# Altium PCB CSC002.pcbdoc (part 3 of 3)
Units mm, origin at the board's own origin, x right, y up, seen from the top; angles counter-clockwise.
Board outline 159.86 x 75.13 mm, 6 copper layers (Top Layer, Mid-Layer 1, Mid-Layer 2, GND, POWER, Bottom Layer), stack 2.494 mm thick; 78 components, 188 nets, 791 pads, 358 vias.
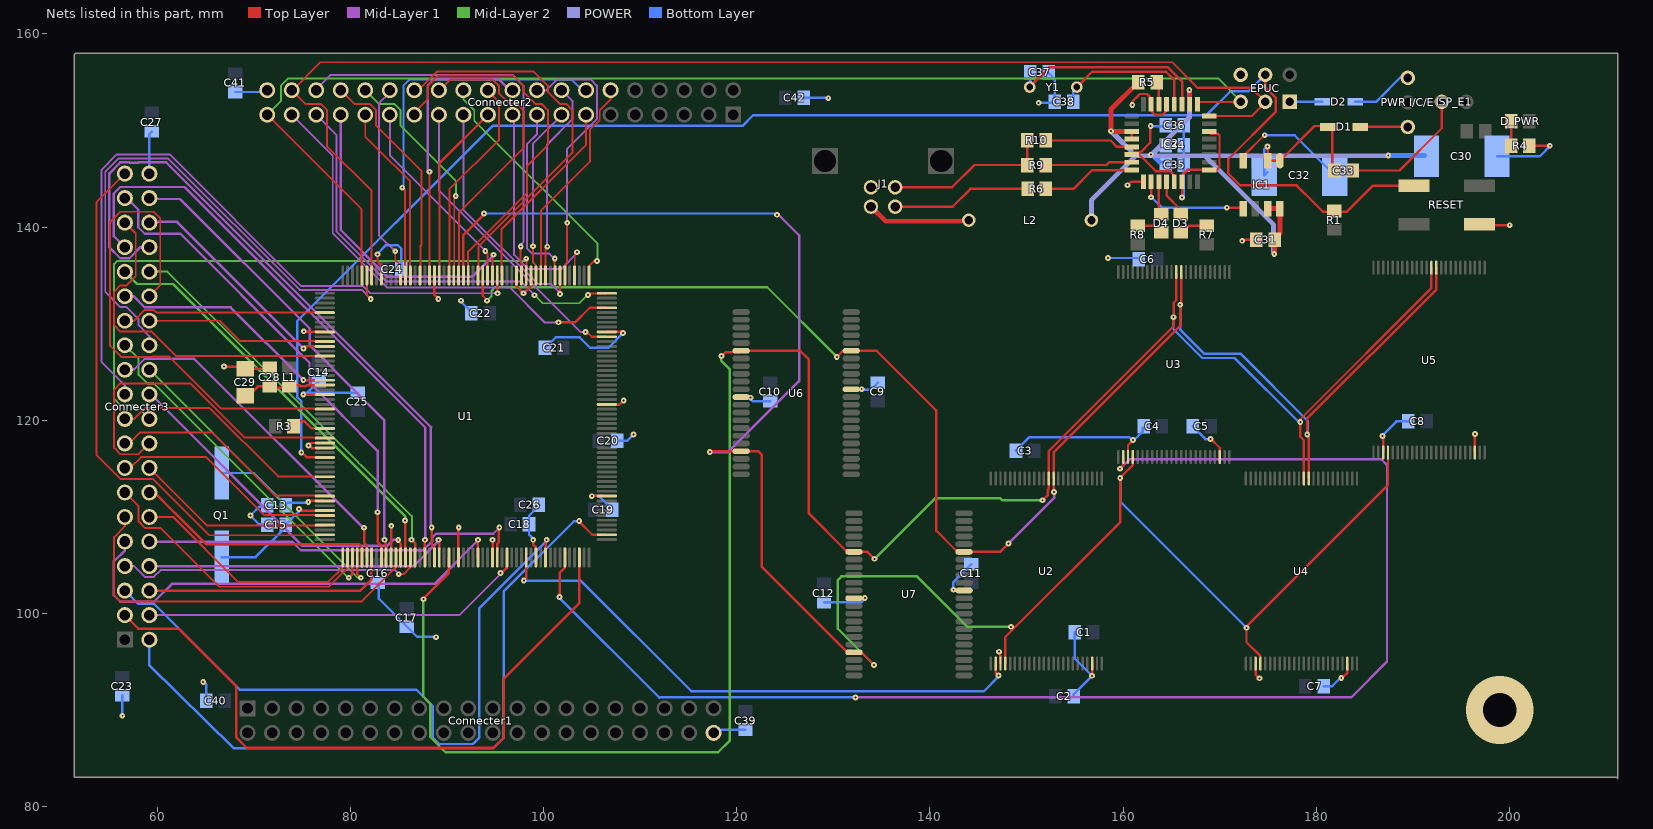
[diagram p7: the nets of this part, all layers, seen from the top]

## Via types
v1: diameter 0.6, hole 0.2, Top Layer to Bottom Layer, 354 vias
v2: diameter 0.6/0.6/0.6/0.6/0.6/0.6 (per signal layer), hole 0.2, Top Layer to Bottom Layer, 1 vias
v3: diameter 0.6, hole 0.2, Top Layer to Bottom Layer, tented bottom, 1 vias
v4: diameter 0.6, hole 0.2, Top Layer to Bottom Layer, tented top, 1 vias
v5: diameter 7, hole 3.5, Top Layer to Bottom Layer, 1 vias

## Nets (pads, with @x,y where several pads share a name; then routed paths per layer and width w, separated by ;. In a path a pad name is that pad's centre, name@x,y a point inside that pad or via, vN(x,y) a via of type N, cw(c..) or ccw(c..) an arc to the next point about the centre after c; other vN are vias at no path point) (continued)
EXT2-12: Connecter2.12 U1.167 | length 23
  Top Layer w0.2: U1.167@99.648,134.24 99.748,134.34 99.748,139.488 99.748,141.738 104.794,146.784 104.794,150.064 105.809,151.079 105.809,152.104 106.934,153.229 Connecter2.12@106.934,154.178
EXT2-13: Connecter2.13 U1.175 | length 20.2
  Top Layer w0.2: U1.175@95.748,135.06 95.66,135.148 95.66,139.803 104.394,148.537 Connecter2.13@104.394,151.638
EXT2-14: Connecter2.14 U1.195 | length 38.8
  Top Layer w0.2: v1@85.4,144.11 85.4,144.058 85.648,143.81 85.648,135.74 U1.195@85.748,135.64
  Bottom Layer w0.2: v1@85.489,144.15 85.489,154.644 86.148,155.303 102.867,155.303 103.992,154.178 Connecter2.14@104.394,154.178
  other v1: 85.36,144.08
EXT2-15: Connecter2.15 U1.168 | length 17.1
  Top Layer w0.2: v1(98.89,138.02) 98.89,136.34 99.148,136.082 U1.168@99.148,135.762
  Mid-Layer 1 w0.2: v1(98.89,138.02) 98.89,148.63 Connecter2.15@101.81,151.55
EXT2-16: Connecter2.16 U1.166 | length 20.8
  Top Layer w0.2: U1.166@100.198,134.996 100.198,137.738 v1@100.435,137.975
  Mid-Layer 1 w0.2: v1@100.35,138.01 100.35,148.543 102.979,151.172 102.979,152.113 102.97,152.122 102.97,153.08 Connecter2.16@101.87,154.18
  other v1: 100.38,137.97
EXT2-17: Connecter2.17 U1.164 | length 18.3
  Top Layer w0.2: v1@101.148,136.67 101.148,135.952 U1.164@101.19,135.91
  Mid-Layer 1 w0.2: Connecter2.17@99.314,151.638 99.314,149.62 98.3,148.606 98.3,138.279 98.29,138.269 98.29,137.771 98.811,137.25 100.6,137.25 101.11,136.74 v1@101.11,136.71
  other v1: 101.16,136.76
EXT2-18: Connecter2.18 U1.162 | length 30.6
  Top Layer w0.2: U1.162@102.16,135.9 102.248,135.988 102.248,136.148 102.42,136.32 102.42,140.41 v1(102.45,140.44)
  Mid-Layer 1 w0.2: Connecter2.18@99.3,154.12 100.205,154.12 101.388,155.303 104.86,155.303 105.519,154.644 105.519,151.172 102.44,148.093 102.44,138.72 102.45,138.72 v1(102.45,140.44)
EXT2-19: Connecter2.19 U1.160 | length 24.9
  Top Layer w0.2: U1.160@103.198,134.996 103.22,135.018 103.22,137.06 v1@103.5,137.34
  Mid-Layer 1 w0.2: Connecter2.19@96.774,151.638 96.95,151.462 96.95,137.131 98.421,135.66 101.81,135.66 v1@103.5,137.35
  other v1: 103.47,137.4
EXT2-20: Connecter2.20 U1.190 | length 28.7
  Top Layer w0.2: U1.190@88.17,135.61 88.17,136.61 88.19,136.63 v1(88.19,145.73)
  Mid-Layer 1 w0.254: v1@88.16,145.64 88,145.8 88,151.001 88.002,151.003 88.002,154.655 88.677,155.33 95.33,155.33 96.482,154.178 Connecter2.20@96.774,154.178
EXT2-21: Connecter2.21 U1.188 | length 18.7
  Top Layer w0.254: U1.188@89.221,135 89.221,146.625 Connecter2.21@94.234,151.638
EXT2-22: Connecter2.22 U1.186 | length 21.2
  Top Layer w0.2: U1.186@90.17,135.64 90.248,135.718 90.248,143.898 95.359,149.009 95.359,152.991 94.234,154.116 Connecter2.22@94.234,154.178
EXT2-23: Connecter2.23 U1.163 | length 25.3
  Top Layer w0.2: v1@101.698,133.112 U1.163@101.698,134.996
  Mid-Layer 1 w0.2: Connecter2.23@91.694,151.638 91.694,141.822 99.396,134.12 100.73,134.12 v1@101.72,133.13
  other v1: 101.7,133.07
EXT2-24: Connecter2.24 U1.157 | length 25.5
  Top Layer w0.2: U1.157@104.698,134.996 104.698,135.948 105.25,136.5 v1@105.53,136.5
  Mid-Layer 2 w0.2: Connecter2.24@91.694,154.178 91.694,153.229 92.819,152.104 92.819,151.031 105.59,138.26 v1@105.59,136.41
  other v1: 105.54,136.49
EXT2-25: Connecter2.25 U1.147 | length 31.5
  Top Layer w0.2: v1(104.35,129.15) 104.45,129.15 104.97,128.63
  Top Layer w0.254: 104.98,128.646 U1.147@106.548,128.646
  Mid-Layer 1 w0.2: Connecter2.25@89.154,151.638 89.154,143.796 103.82,129.13 v1@104.34,129.13
EXT2-26: Connecter2.26 U1.184 | length 30.1
  Top Layer w0.2: Connecter2.26@89.154,154.178 89.268,154.178 90.393,155.303 94.7,155.303 95.359,154.644 95.359,153.881 96.477,152.763 97.24,152.763 97.899,152.104 97.899,148.179 91.3,141.58 ; U1.184@91.148,135.7 91.22,135.772 91.22,141.52
EXT2-27: Connecter2.27 U1.182 | length 38.3
  Top Layer w0.2: Connecter2.27@86.49,151.76 88.029,153.299 88.029,154.644 89.088,155.703 96.84,155.703 97.899,154.644 97.899,154.002 99.138,152.763 99.78,152.763 100.439,152.104 100.439,148.489 98.299,146.349 98.299,143.573 92.178,137.452 ; U1.182@92.19,135.49 92.19,137.44
EXT2-28: Connecter2.28 U1.180 | length 39.9
  Top Layer w0.2: Connecter2.28@86.614,154.178 86.997,154.178 88.922,156.103 98.98,156.103 100.439,154.644 100.439,154.002 101.678,152.763 102.32,152.763 102.979,152.104 102.979,147.688 93.248,137.957 U1.180@93.248,135.47
EXT2-29: Connecter2.29 U1.178 | length 20.6
  Top Layer w0.2: v1@93.96,137.51 94.198,137.272 U1.178@94.198,134.996
  Mid-Layer 1 w0.2: Connecter2.29@84.074,151.638 84.074,147.456 v1@93.865,137.665
  other v1: 93.96,137.52
EXT2-30: Connecter2.30 U1.196 | length 19.8
  Top Layer w0.2: v1(84.64,137.5) 84.64,136.59 85.148,136.082 85.148,135.872 U1.196@85.23,135.79
  Mid-Layer 1 w0.2: Connecter2.30@84.074,154.178 84.074,153.924 82.949,152.799 82.949,139.181 v1@84.65,137.48
EXT2-31: Connecter2.31 U1.194 | length 17.9
  Top Layer w0.2: Connecter2.31@81.534,151.638 81.534,149.366 82.662,148.238 82.692,148.238 86.148,144.782 86.148,135.682 U1.194@86.19,135.64
EXT2-32: Connecter2.32 U1.185 | length 23.5
  Top Layer w0.2: U1.185@90.7,135.75 90.748,135.798 90.748,143.058 v1(90.9,143.21)
  Mid-Layer 2 w0.2: Connecter2.32@81.534,154.178 82.949,152.763 84.54,152.763 85.199,152.104 85.199,150.513 90.91,144.802 v1@90.91,143.03
EXT2-33: Connecter2.33 U1.177 | length 31.9
  Top Layer w0.2: U1.177@94.74,135.78 94.71,135.81 94.71,137.05 94.748,137.088 v1(94.8,137.14)
  Mid-Layer 1 w0.254: Connecter2.33@78.994,151.638 78.994,139.696 83.84,134.85 92.58,134.85 v1@94.64,136.91
EXT2-34: Connecter2.34 U1.192 | length 23.7
  Top Layer w0.2: Connecter2.34@78.994,154.178 80.409,152.763 82,152.763 82.659,152.104 82.659,150.513 87.35,145.822 87.35,138.151 87.248,138.049 U1.192@87.248,134.88
EXT2-35: Connecter2.35 U1.156 | length 44.5
  Top Layer w0.2: v1@104.58,132.95 104.776,133.146 U1.156@106.548,133.146
  Mid-Layer 1 w0.2: Connecter2.35@76.454,151.638 78.567,149.525 78.567,139.519 83.706,134.38 97.65,134.38 v1@99.07,132.96
  Mid-Layer 2 w0.2: v1(99.07,132.95) 99.1,132.95 99.933,132.117 103.707,132.117 v1@104.62,133.03
  other v1: 104.59,132.98
EXT2-36: Connecter2.36 U1.171 | length 41.7
  Top Layer w0.2: v1(97.63,138) 97.6,137.97 97.6,136.391 97.69,136.301 U1.171@97.69,135.738
  Mid-Layer 1 w0.2: Connecter2.36@76.37,154.15 77.977,155.757 96.786,155.757 97.782,154.761 ; v1(97.63,138) 97.51,138 97.49,138.02 97.89,138.42 97.89,138.434 97.9,138.444 97.9,154.639 97.899,154.64
EXT2-37: Connecter2.37 U1.153 | length 47.1
  Top Layer w0.254: v1@101.52,130.25 101.64,130.13 103.26,130.13 104.776,131.646 U1.153@106.548,131.646
  Mid-Layer 1 w0.2: Connecter2.37@73.914,151.638 78.167,147.385 78.167,139.353 83.77,133.75 96.471,133.75 100.091,130.13 101.49,130.13 v1@101.61,130.25
  other v1: 101.54,130.14
EXT2-38: Connecter2.38 EPUC.2 IC2.24 U1.202 | length 134.2
  Top Layer w0.2: Connecter2.38@73.84,154.04 73.947,154.143 76.874,157.07 165.09,157.07 167.705,154.455 ; Connecter2.38@74.328,154.178 Connecter2.38@73.914,154.178 ; Connecter2.38@74.368,154.178 Connecter2.38@73.914,154.178 ; U1.202@82.18,135.52 82.18,143.74 77.579,148.341 77.579,152.104 76.92,152.763 75.329,152.763 Connecter2.38@73.914,154.178
  Top Layer w0.254: 167.706,154.406 167.72,154.42 ; 167.74,154.41 173.31,154.41 174.77,152.95 173.326,151.506 IC2.24@168.906,151.506
EXT2-39: Connecter2.39 EPUC.3 IC2.25 U1.204 | length 128.9
  Top Layer w0.2: Connecter2.39@71.374,151.638 81.148,141.864 U1.204@81.148,135.71 ; IC2.25@167.73,152.82 167.882,152.972 EPUC.3@172.174,152.972
  Mid-Layer 2 w0.2: Connecter2.39@71.374,151.638 72.789,153.053 72.789,154.644 73.545,155.4 149.953,155.4 149.957,155.396 169.864,155.396 EPUC.3@172.31,152.95
EXT3-2: Connecter3.2 U1.106 | length 72.7
  Top Layer w0.254: v1@103.68,109.5 105.034,108.146 U1.106@106.548,108.146
  Bottom Layer w0.254: Connecter3.2@59.182,97.282 59.182,94.618 67.94,86.024 94.765,86.024 95.894,87.153 95.894,102.304 103.13,109.54 v1@103.65,109.54
  other v1: 103.68,109.56
EXT3-3: Connecter3.3 U1.102 | length 70.2
  Top Layer w0.254: Connecter3.3@56.642,99.822 58.03,98.434 62.206,98.434 68.19,92.45 ; 68.19,92.443 68.19,87.153 69.265,86.078 94.819,86.078 95.894,87.153 95.894,93.258 103.675,101.039 U1.102@103.675,105.61
EXT3-4: Connecter3.4 U1.87 | length 39
  Top Layer w0.254: v1@95.647,104.17 96.175,104.698 U1.87@96.175,104.87
  Mid-Layer 1 w0.2: Connecter3.4@59.182,99.822 91.266,99.822 95.414,103.97 95.42,103.97 v1@95.52,104.07
  other v1: 95.55,104.17
EXT3-5: Connecter3.5 U1.95 | length 70.6
  Top Layer w0.254: U1.95@100.198,105.796 100.198,107.448 v1@100.32,107.57
  Bottom Layer w0.254: Connecter3.5@56.642,102.362 58.03,100.974 59.659,100.974 ; 59.69,100.95 68.55,92.09 86.831,92.09 88.51,90.411 88.51,87.153 89.185,86.478 92.679,86.478 93.354,87.153 93.354,100.544 v1@100.42,107.61
  other v1: 100.32,107.62
EXT3-6: Connecter3.6 U1.59 | length 24.8
  Top Layer w0.254: Connecter3.6@59.182,102.362 66.198,102.362 66.23,102.33 81,102.33 82.175,103.505 U1.59@82.175,104.79
EXT3-7: Connecter3.7 U1.67 | length 31
  Top Layer w0.2: v1(85,104.06) 85.498,104.06 86.148,104.71 U1.67@86.148,104.85 ; U1.67@86.148,104.94 U1.67@86.248,105.04
  Mid-Layer 1 w0.2: Connecter3.7@56.642,104.902 57.591,104.902 58.716,103.777 59.648,103.777 60.346,104.475 84.635,104.475 v1@85.055,104.055
EXT3-8: Connecter3.8 U1.73 | length 32.2
  Top Layer w0.254: v1(89.12,107.62) 89.21,107.53 U1.73@89.21,106.65
  Mid-Layer 1 w0.254: Connecter3.8@59.182,104.902 86.552,104.902 v1@89.29,107.64
EXT3-9: Connecter3.9 U1.81 | length 48.5
  Top Layer w0.254: U1.81@93.198,105.796 v1@93.198,107.418
  Mid-Layer 1 w0.254: Connecter3.9@56.642,107.442 56.642,106.531 55.49,105.379 55.49,101.885 56.165,101.21 59.659,101.21 61.512,103.063 88.693,103.063 93.23,107.6 v1@93.36,107.6
  other v1: 93.2,107.62
EXT3-10: Connecter3.10 U1.85 | length 40.3
  Top Layer w0.254: U1.85@95.221,106.54 95.221,107.234 95.35,107.363 95.35,108.85 v1(95.41,108.91)
  Mid-Layer 1 w0.254: Connecter3.10@59.182,107.442 73.946,107.442 74.849,106.539 87.526,106.539 88.45,107.463 88.45,107.837 88.86,108.247 94.77,108.247 ; 94.787,108.247 v1@95.46,108.92
EXT3-11: Connecter3.11 U1.64 | length 39.8
  Top Layer w0.2: Connecter3.11@56.642,109.982 56.642,109.033 55.517,107.908 55.517,101.896 56.176,101.237 79.317,101.237 79.32,101.24 81.178,101.24 84.648,104.71 U1.64@84.648,105.11
EXT3-12: Connecter3.12 U1.53 | length 23.4
  Top Layer w0.2: Connecter3.12@59.182,109.982 61.638,109.982 68.35,103.27 77.7,103.27 U1.53@79.18,104.75
EXT3-13: Connecter3.13 U1.54 | length 28.9
  Top Layer w0.2: Connecter3.13@56.642,112.522 58.057,111.107 58.057,109.516 58.716,108.857 60.307,108.857 66.407,102.757 77.753,102.757 79.648,104.652 U1.54@79.648,104.79
EXT3-14: Connecter3.14 U1.57 | length 26.2
  Top Layer w0.254: Connecter3.14@59.182,112.522 59.698,112.522 61.811,110.409 61.815,110.409 65.055,107.169 78.721,107.169 78.725,107.173 80.896,107.173 81.175,106.894 81.175,105.105 U1.57@81.21,105.07
EXT3-15: Connecter3.15 U1.47 | length 23.3
  Top Layer w0.2: Connecter3.15@56.642,115.062 57.192,115.062 58.317,116.187 65.053,116.187 71.044,110.196 76.85,110.196 U1.47@76.95,110.096
EXT3-16: Connecter3.16 U1.49 | length 20.8
  Top Layer w0.2: Connecter3.16@59.182,115.062 65.148,109.096 U1.49@77.5,109.096
EXT3-17: Connecter3.17 U1.43 | length 24.5
  Top Layer w0.2: Connecter3.17@56.642,117.602 57.072,117.602 58.197,118.727 65.703,118.727 72.234,112.196 77.86,112.196 U1.43@77.96,112.096
EXT3-18: Connecter3.18 U1.31 | length 34.2
  Top Layer w0.2: Connecter3.18@59.182,117.602 59.166,117.602 58.041,116.477 56.176,116.477 55.517,117.136 55.517,123.148 56.176,123.807 59.648,123.807 59.655,123.8 63.464,123.8 69.068,118.196 U1.31@76.71,118.196
EXT3-19: Connecter3.19 U1.39 | length 23.5
  Top Layer w0.2: Connecter3.19@56.642,120.142 57.591,120.142 58.716,121.267 65.432,121.267 72.503,114.196 76.704,114.196 U1.39@76.72,114.18
EXT3-20: Connecter3.20 U1.170 | length 62.5
  Top Layer w0.2: v1(98.2,136.73) 98.22,136.71 U1.170@98.22,135.49
  Mid-Layer 2 w0.2: Connecter3.20@59.182,120.142 57.767,121.557 56.176,121.557 55.517,122.216 55.517,136.161 55.866,136.51 98.187,136.51 v1@98.19,136.507
EXT3-21: Connecter3.21 U1.176 | length 73.8
  Top Layer w0.2: v1(95.23,133.14) U1.176@95.23,135.07
  Mid-Layer 1 w0.2: Connecter3.21@56.642,122.682 56.642,123.631 54.209,126.064 54.209,145.908 55.822,147.521 61.271,147.521 74.902,133.89 81.316,133.89 82.056,133.15 v1@95.2,133.15
EXT3-22: Connecter3.22 U1.65 | length 33.9
  Top Layer w0.254: v1(84.95,107.6) 84.92,107.57 84.92,107.53 85.21,107.24 U1.65@85.21,106.61
  Mid-Layer 1 w0.254: Connecter3.22@59.03,123 75.037,106.993 83.78,106.993 84.407,107.62 84.93,107.62 v1(84.95,107.6)
EXT3-23: Connecter3.23 U1.58 | length 35.9
  Top Layer w0.254: v1@81.41,108.9 81.41,107.32 81.698,107.032 U1.58@81.698,105.796
  Mid-Layer 1 w0.254: Connecter3.23@56.43,125.28 57.611,125.28 58.705,126.374 63.809,126.374 v1@81.357,108.827
  other v1: 81.4,108.87
EXT3-24: Connecter3.24 U1.56 | length 33
  Top Layer w0.254: U1.56@80.698,105.796 80.698,104.072 v1@81.05,103.72
  Mid-Layer 2 w0.2: Connecter3.24@59.182,125.222 59.208,125.222 77.86,106.57 80.73,103.7 v1@81.08,103.7
  other v1: 81.07,103.69
EXT3-25: Connecter3.25 U1.55 | length 36.4
  Top Layer w0.254: v1@79.83,103.72 80.198,104.088 U1.55@80.198,105.796 ; U1.55@80.175,104.914 U1.55@80.221,104.96
  Mid-Layer 2 w0.2: Connecter3.25@56.642,127.762 58.057,126.347 58.057,124.703 58.953,123.807 59.648,123.807 v1@79.767,103.687
  other v1: 79.83,103.69
EXT3-26: Connecter3.26 U1.203 | length 57
  Top Layer w0.2: U1.203@81.698,134.996 81.698,133.012 v1@82.16,132.55
  Mid-Layer 1 w0.2: Connecter3.26@59.182,127.762 59.182,128.711 58.057,129.836 58.057,130.478 56.818,131.717 56.176,131.717 54.609,133.284 54.609,145.742 55.988,147.121 61.105,147.121 74.736,133.49 81.15,133.49 v1@82.11,132.53
  other v1: 82.1,132.55
EXT3-27: Connecter3.27 U1.5 | length 21
  Top Layer w0.2: Connecter3.27@56.642,130.302 57.591,130.302 58.716,131.427 59.648,131.427 59.905,131.17 76.956,131.17 U1.5@77.03,131.096
EXT3-28: Connecter3.28 U1.11 | length 18.6
  Top Layer w0.2: Connecter3.28@59.182,130.302 66.488,130.302 68.594,128.196 76.77,128.196 U1.11@76.87,128.096
EXT3-29: Connecter3.29 U1.19 | length 23.4
  Top Layer w0.254: v1@75.13,124.17 75.154,124.146 U1.19@77.348,124.146
  Mid-Layer 1 w0.254: 57.575,132.82 58.705,131.69 67.59,131.69 v1(75.12,124.16)
EXT3-30: Connecter3.30 U1.25 | length 53
  Top Layer w0.2: Connecter3.30@59.182,132.842 60.307,133.967 60.307,140.928 59.648,141.587 56.176,141.587 55.117,140.528 55.117,127.696 56.243,126.57 59.425,126.57 59.435,126.58 61.25,126.58 66.634,121.196 U1.25@78.09,121.196
EXT3-31: Connecter3.31 U1.66 | length 43.1
  Top Layer w0.254: v1(85.65,109.63) 85.675,109.605 U1.66@85.675,106.5
  Mid-Layer 2 w0.254: Connecter3.31@56.642,135.382 57.916,134.108 61.622,134.108 85.65,110.08 85.65,109.67 v1@85.69,109.63
EXT3-32: Connecter3.32 U1.68 | length 41.3
  Top Layer w0.254: v1(86.32,107.62) 86.721,107.219 U1.68@86.721,106.57
  Mid-Layer 2 w0.2: Connecter3.32@59.182,135.382 61.048,135.382 80.8,115.63 80.8,115.621 81.151,115.27 81.16,115.27 86.36,110.07 v1@86.36,107.64
EXT3-33: Connecter3.33 U1.70 | length 61.6
  Top Layer w0.254: U1.70@87.675,106.58 87.675,107.575 v1(87.72,107.62)
  Mid-Layer 1 w0.254: Connecter3.33@56.642,137.922 55.49,139.074 55.49,143.479 56.165,144.154 62.826,144.154 87.745,119.235 ; v1@87.74,107.58 87.74,119.24
EXT3-34: Connecter3.34 U1.72 | length 70.8
  Top Layer w0.254: v1(88.41,108.91) 88.41,107.159 88.675,106.894 88.675,106.636 U1.72@88.721,106.59
  Mid-Layer 1 w0.254: Connecter3.34@59.182,137.922 58.271,137.922 57.119,136.77 56.165,136.77 55.036,137.899 55.036,145.565 56.165,146.694 57.119,146.694 57.133,146.68 58.03,146.68 58.044,146.694 60.928,146.694 88.366,119.256 ; v1@88.33,108.89 88.33,119.3
EXT3-35: Connecter3.35 U1.14 | length 34.7
  Top Layer w0.2: Connecter3.35@56.642,140.462 57.767,139.337 57.767,134.916 56.818,133.967 56.176,133.967 55.517,133.308 55.517,129.836 56.176,129.177 59.358,129.177 ; 59.41,129.17 61.91,126.67 76.416,126.67 U1.14@76.49,126.596
EXT3-36: Connecter3.36 U1.12 | length 23.7
  Top Layer w0.254: v1@75.11,127.48 75.276,127.646 U1.12@77.348,127.646
  Mid-Layer 1 w0.254: Connecter3.36@59.19,140.54 62.05,140.54 v1(75.15,127.44)
EXT3-37: Connecter3.37 U1.61 | length 49.8
  Top Layer w0.254: v1(82.81,110.48) 82.81,107.401 83.175,107.036 U1.61@83.175,106.68
  Mid-Layer 1 w0.254: Connecter3.37@56.55,143.29 58.03,141.81 58.03,139.985 58.705,139.31 62.393,139.31 74.89,126.813 74.897,126.813 75.757,125.953 75.757,123.886 79.16,120.483 79.16,120.47 82.81,116.82 v1@82.81,110.45
EXT3-38: Connecter3.38 U1.62 | length 48.3
  Top Layer w0.254: v1(83.52,107.62) 83.675,107.465 U1.62@83.675,106.61
  Mid-Layer 1 w0.254: Connecter3.38@59.28,143.2 59.57,142.91 62.357,142.91 75.797,129.47 75.797,127.727 80.737,122.787 80.737,122.773 83.52,119.99 v1(83.52,107.62)
EXT3-39: Connecter3.39 U1.51 | length 57.6
  Top Layer w0.2: Connecter3.39@56.642,145.542 53.72,142.62 53.72,116.393 56.176,113.937 59.513,113.937 65.354,108.096 U1.51@77.5,108.096
"EXTERNAL 3.3V": D2.1 EPUC.1 | length 3.4
  Bottom Layer w0.254: EPUC.1@177.254,152.972 D2.1@180.634,152.972
GND: C1.1 C2.1 C3.1 C4.1 C5.1 C6.1 C7.1 C8.1 C9.1 C10.1 C11.1 C12.1 C13.2 C14.1 C15.2 C16.1 C17.1 C18.1 C19.1 C20.1 C21.1 C22.1 C23.1 C24.1 C25.1 C26.1 C27.1 C28.2 C29.2 C30.2 C31.2 C32.2 C33.2 C34.2 C35.2 C36.2 C37.2 C38.2 C39.1 C40.1 C41.1 C42.1 Connecter1.40 Connecter2.40 Connecter3.40 EPUC.6 IC1.4 IC2.9 IC2.14 IC2.17 IC2.22 IC2.29 IC2.31 ISP_E1.2 J1.4 R4.1 RESET.1 U1.9 U1.22 U1.32 U1.33 U1.63 U1.77 U1.84 U1.93 U1.114 U1.133 U1.148 U1.169 U1.172 U1.189 U1.200 U2.27 U2.46 U3.27 U3.46 U4.27 U4.46 U5.27 U5.46 U6.12 U6.34 U7.12 U7.34 | length 226.1
  Top Layer w0.254: v1(66.92,125.56) 68.77,125.56 C29.2@68.8,125.53 ; C29.2@69.088,125.352 71.592,125.352 C28.2@71.7,125.46 ; v1@74.944,122.646 U1.22@77.348,122.646 ; v1@75.14,129.15 75.144,129.146 U1.9@77.348,129.146 ; U1.33@76.8,117.123 76.017,117.123 75.7,117.44 75.906,117.646 U1.32@77.348,117.646 ; v1(82.8,137.18) 82.8,136.469 83.175,136.094 83.175,135.425 U1.200@83.2,135.4 ; U1.63@84.22,106.52 84.21,106.53 84.21,109.06 v1(84.22,109.07) ; U1.189@88.698,134.996 88.698,132.972 v1@89.14,132.53 ; U1.77@91.175,106.55 91.175,108.875 v1(91.21,108.91) ; U1.84@94.675,106.57 94.72,106.615 v1(94.72,107.62) ; U1.172@97.18,134.18 97.18,133.89 97.93,133.14 98.698,133.908 U1.169@98.698,134.996 ; v1(98.92,107.62) 98.92,107.149 99.175,106.894 99.175,106.496 U1.93@99.221,106.45 ; v1@104.99,112.169 105.944,112.169 U1.114@105.99,112.123 ; U1.148@106.548,129.146 108.064,129.146 v1@108.21,129 ; U1.133@107.36,121.623 107.853,121.623 v1(108.29,122.06) ; v1@147.13,95.99 147.304,95.816 U2.27@147.304,94.808 ; v1@156.804,93.544 U2.46@156.804,94.808 ; v1@160.44,144.3 160.846,144.706 IC2.9@162.106,144.706 ; U3.27@160.512,116.202 160.512,117.412 v1@160.97,117.87 ; v1@160.93,152.64 160.93,152.98 161.529,153.579 161.529,153.591 161.721,153.783 162.491,153.783 162.96,153.314 162.96,152.76 IC2.31@162.906,152.706 ; IC2.31@162.97,152.75 162.87,152.65 162.87,152.08 163.321,151.629 164.091,151.629 164.57,152.108 164.57,152.642 IC2.29@164.506,152.706 ; v1@166.106,143.194 IC2.14@166.106,144.706 166.1,144.712 166.1,145.362 166.668,145.93 IC2.17@168.87,145.93 ; IC2.22@168.906,149.906 169.129,149.683 169.791,149.683 169.983,149.491 169.983,146.243 IC2.17@169.59,145.85 ; v1@169.12,118.04 170.012,117.148 U3.46@170.012,116.202 ; EPUC.6@172.27,155.91 EPUC.6@172.428,155.752 ; v1@172.424,138.684 C31.2@173.802,138.684 ; IC1.4@172.428,147.249 IC1.4@172.428,146.876 172.428,147.318 v1@174.67,149.56 ; U4.27@173.72,94.808 173.72,93.66 v1@174.14,93.24 ; 182.89,93.51 183.22,93.84 U4.46@183.22,94.808 ; C33.2@183.792,145.86 188.63,145.86 193,150.23 ISP_E1.2@193,152.95 ; v1@186.88,118.3 186.928,118.252 U5.27@186.928,116.652 ; U5.46@196.428,116.652 196.428,118.518 v1@196.49,118.58 ; RESET.1@197.07,140.2 v1(200.04,140.2) ; R4.1@202.04,148.42 v1(204.19,148.42)
  Bottom Layer w0.254: C23.1@56.388,91.506 56.388,89.362 v1@56.44,89.31 ; Connecter3.40@59.182,145.542 59.182,149.622 C27.1@59.43,149.87 ; v1@64.79,92.95 65.09,92.65 C40.1@65.09,90.932 ; C41.1@68.072,153.99 71.16,153.99 Connecter2.40@71.37,154.2 ; C15.2@71.28,109.23 70.52,109.23 69.67,110.08 69.67,110.16 70.57,111.06 71.234,111.06 C13.2@71.376,111.202 ; C15.2@71.376,109.146 C15.2@71.376,109.17 C15.2@71.376,109.23 ; v1@75.15,122.68 v1@75.31,122.84 ; v1@75.19,122.84 v1@75.31,122.84 ; C14.1@76.708,124.018 75.56,122.87 ; C25.1@80.772,122.87 75.56,122.87 ; v1@82.74,137.24 82.793,137.24 83.68,138.127 84.9,138.127 85.267,137.76 85.267,135.647 C24.1@85.278,135.636 ; C16.1@82.93,103.05 82.93,101.54 C17.1@85.852,98.618 86.91,97.56 v1@88.84,97.56 ; v1@91.42,132.31 92.522,131.208 C22.1@92.522,131.064 ; v1@98.99,107.66 98.486,108.164 C18.1@98.486,109.22 98.486,110.116 C26.1@99.55,111.18 ; C21.1@100.142,127.508 100.18,127.508 101.257,128.585 103.742,128.585 104.819,127.508 106.718,127.508 v1@108.23,129.02 ; v1@105.12,112.16 105.706,112.16 C19.1@107.122,110.744 ; C20.1@107.63,117.856 108.636,117.856 v1@109.45,118.67 ; Connecter1.40@117.71,87.49 118.17,87.95 C39.1@120.904,87.95 ; v1@121.42,122.2 121.634,121.986 C10.1@123.444,121.986 ; C42.1@126.934,153.416 129.294,153.416 v1@129.44,153.27 ; C12.1@129.032,101.158 132.908,101.158 v1@133.36,101.61 ; v1@133.01,123.16 133.894,123.16 C9.1@134.62,123.886 ; v1@142.4,102.37 142.4,103.218 C11.1@144.272,105.09 ; C3.1@148.91,116.84 150.327,118.257 160.62,118.257 160.847,118.03 161.22,118.03 162.02,118.83 C4.1@162.02,119.25 ; v1(151.26,152.87) 152.87,152.87 C38.2@152.99,152.99 ; C37.2@152.19,156.05 152.936,155.304 C38.2@152.936,152.972 ; C2.1@154.874,91.44 154.874,91.584 v1@156.74,93.45 ; C1.1@155.006,98.044 155.006,95.304 v1(156.77,93.54) v1@156.79,93.52 ; v1(158.44,136.8) 161.52,136.8 C6.1@161.57,136.75 ; v1@166.08,143.01 166.3,143.23 C35.2@166.3,146.462 ; C35.2@166.24,146.55 166.3,146.61 C34.2@166.3,148.494 C36.2@166.3,150.526 ; C5.1@167.198,119.38 168.528,118.05 v1@169.09,118.05 ; v1@174.67,149.51 177.762,149.51 C32.2@181.92,145.352 ; C7.1@180.782,92.456 181.636,92.456 v1@182.52,93.34 ; v1@186.9,118.48 188.308,119.888 C8.1@189.55,119.888 ; C30.2@198.722,147.32 203.14,147.32 v1@204.27,148.45 ; v1@75.31,122.84 75.34,122.87 75.56,122.87 ; v1@75.31,122.84 75.53,122.84 75.56,122.87
  other v1: 56.38,89.4 64.75,92.9 174.13,93.28 182.59,93.3 147.16,96.04 88.85,97.54 133.26,101.58 142.44,102.45 69.66,110.15 104.99,112.14 75.66,117.39 161.04,117.97 169.06,118.07 186.87,118.36 109.3,118.53 196.43,118.58 121.44,122.34 75.11,122.68 132.94,123.22 108.21,129.02 75.17,129.21 91.45,132.38 89.1,132.55 97.92,133.15 172.33,138.58 166.09,143.08 160.45,144.34 174.67,149.52 160.96,152.64 129.47,153.35
  other v5: 199,90
NetC13_1: C13.1 Q1.2 U1.44 | length 12.2
  Top Layer w0.254: v1@75.66,111.6 75.706,111.646 U1.44@77.348,111.646
  Bottom Layer w0.254: Q1.2@66.672,114.536 69.964,114.536 C13.1@73.28,111.22 ; C13.1@73.276,111.202 73.511,111.437 75.387,111.437 v1@75.57,111.62
  other v1: 75.63,111.55
NetC15_1: C15.1 Q1.1 U1.46 | length 13
  Top Layer w0.254: v1@74.7,110.8 74.854,110.646 U1.46@77.348,110.646
  Bottom Layer w0.254: Q1.1@66.672,105.836 70.186,105.836 C15.1@73.42,109.07 ; C15.1@73.276,109.17 74.65,110.544 v1@74.65,110.83
  other v1: 74.68,110.81
NetC28_1: C28.1 C29.1 L1.2 U1.20 | length 8.7
  Top Layer w0.254: C29.1@69.32,122.42 70.41,123.51 71.58,123.51 71.72,123.37 73.63,123.37 73.906,123.646 74.747,123.646 74.86,123.533 75.38,123.533 75.493,123.646 U1.20@77.348,123.646
NetC30_1: C30.1 C31.1 C34.1 C35.1 IC1.7 IC1.8 IC2.3 IC2.4 IC2.26 L2.1 R5.1 | length 82.3
  Top Layer w0.254: IC2.3@160.84,149.86 160.906,149.794 IC2.4@160.906,149.106 ; v1@166.906,154.066 v1@166.92,154.08 ; IC1.7@174.968,141.923 IC1.7@175.015,141.97 ; v1@175.66,137.35 v1@175.702,137.392
  Top Layer w0.5: v1@158.75,149.89 158.75,152.182 R5.1@161.572,155.004 ; v1@158.91,149.9 IC2.3@160.31,149.9 ; IC2.26@166.906,152.706 v1@166.906,154.066 ; IC1.7@174.923,141.923 IC1.7@174.968,141.923 IC1.8@176.238,141.923 C31.1@176.238,139.318 ; v1@175.702,137.192 175.702,137.392 C31.1@175.702,138.684
  POWER w0.5: L2.1@156.718,140.716 156.718,142.778 161.32,147.38 ; v1@158.75,149.95 161.32,147.38 ; v1@166.87,154.2 166.87,151.36 v1@162.89,147.38 ; v1@175.58,137.39 175.58,140.25 168.45,147.38 ; v1@187.37,147.38 168.45,147.38 ; 161.32,147.38 v1@162.89,147.38 ; v1@162.89,147.38 168.45,147.38
  Bottom Layer w0.254: C35.1@163.78,146.73 C35.1@164.14,146.73 ; C34.1@163.924,148.494 C34.1@164.4,148.494 ; C35.1@164.4,146.69 C35.1@164.49,146.6
  Bottom Layer w0.5: C35.1@163.78,146.73 162.97,147.54 C34.1@163.924,148.494 ; v1(187.46,147.4) C30.1@191.24,147.4
  other v1: 175.65,137.22 162.87,147.5 158.76,149.93 166.86,154.19
NetC32_1: C32.1 C33.1 D1.1 IC1.1 IC1.2 | length 17.3
  Top Layer w0.254: v1@174.98,148.3 174.968,148.288 IC1.2@174.968,146.876 IC1.1@176.238,146.876 179.832,150.47 D1.1@181.17,150.47 ; C33.1@181.682,145.89 D1.1@181.682,150.424
  Bottom Layer w0.254: C32.1@174.95,145.682 C32.1@174.62,145.352 174.62,148.04 v1@174.99,148.41
  other v1: 174.95,148.34
NetC37_1: C37.1 IC2.27 Y1.1 | length 21.1
  Top Layer w0.254: Y1.1@150.33,154.496 152.369,156.535 164.647,156.535 166.106,155.076 IC2.27@166.106,152.706
  Bottom Layer w0.254: Y1.1@150.33,154.496 150.396,154.562 C37.1@150.396,156.02
NetC38_1: C38.1 IC2.28 Y1.2 | length 15.3
  Top Layer w0.254: Y1.2@155.21,154.496 156.795,156.081 164.459,156.081 165.306,155.234 IC2.28@165.306,152.706
  Bottom Layer w0.254: C38.1@154.836,152.972 154.836,154.122 Y1.2@155.21,154.496
NetD1_2: "PWR I/C/E.1" D1.2 | length 4.3
  Top Layer w0.254: D1.2@184.82,150.398 189.166,150.398
NetD2_2: "PWR I/C/E.3" D2.2 | length 6.1
  Bottom Layer w0.254: D2.2@184.034,152.972 186.17,152.972 188.956,155.758
NetD3_1: D3.1 R7.2 | length 2.8
  Top Layer w0.254: D3.1@166.16,139.47 166.832,140.142 R7.2@168.656,140.142
NetD3_2: D3.2 IC2.12 | length 3.6
  Top Layer w0.254: IC2.12@164.506,144.706 164.506,143.254 D3.2@166.02,141.74
NetD4_1: D4.1 R8.2 | length 2.6
  Top Layer w0.254: R8.2@161.544,140.142 163.288,140.142 D4.1@163.86,139.57
NetD4_2: D4.2 IC2.11 | length 3.4
  Top Layer w0.254: IC2.11@163.706,144.706 163.706,141.714 D4.2@163.99,141.43
NetD_PWR_2: D_PWR.2 R4.2 | length 2.5
  Top Layer w0.254: R4.2@200.18,148.4 D_PWR.2@200.18,150.94
NetEPUC_5: EPUC.5 R1.1 RESET.2 U1.35 | length 162.1
  Top Layer w0.254: v1@74.9,116.73 75.484,116.146 U1.35@77.348,116.146 ; EPUC.5@174.714,155.762 174.714,154.495 175.791,153.418 175.791,151.931 170.89,147.03 170.89,145.56 172.13,144.32 177.96,144.32 179.86,142.42 180.68,141.6 183.17,141.6 185.874,144.304 RESET.2@190.11,144.304
  Bottom Layer w0.254: v1(74.91,116.66) 74.91,121.993 74.483,122.42 74.483,130.253 94.716,150.486 120.594,150.486 121.711,151.603 168.651,151.603 171.097,154.049 172.969,154.049 174.74,155.82 EPUC.5@174.83,155.82
NetIC1_5: IC1.5 IC2.10 | length 11.7
  Top Layer w0.254: IC2.10@162.831,144.631 IC2.10@162.906,144.706 162.906,143.276 v1@162.84,143.21 ; v1@162.873,143.107 v1(162.89,143.09) ; IC2.10@162.97,144.108 IC2.10@162.97,144.19 ; v1(170.74,142.01) 172.39,142.01 IC1.5@172.42,142.04
  Bottom Layer w0.254: v1@162.915,143.125 164.03,142.01 v1(170.74,142.01)
NetIC2_5: IC2.5 R10.2 | length 9.2
  Top Layer w0.254: R10.2@151.996,148.968 158.722,148.968 159.384,148.306 IC2.5@160.906,148.306
NetIC2_7: IC2.7 R9.2 | length 9
  Top Layer w0.254: R9.2@151.996,146.428 158.268,146.428 158.546,146.706 IC2.7@160.906,146.706
NetIC2_8: IC2.8 R6.2 | length 9.7
  Top Layer w0.254: R6.2@152.014,143.954 154.854,143.954 156.806,145.906 IC2.8@160.906,145.906
NetIC2_30: IC2.30 R5.2 | length 2.4
  Top Layer w0.254: R5.2@163.472,155.004 163.706,154.77 IC2.30@163.706,152.706
NetR3_1: R3.1 U1.29 | length 3.4
  Top Layer w0.254: R3.1@74.102,119.888 75.252,119.888 75.971,119.169 U1.29@77.19,119.169
NetU1_91: U1.91 U2.26 | length 58.5
  Top Layer w0.254: v1@97.98,103.41 98.198,103.628 U1.91@98.198,105.796 ; U1.91@98.19,106.06 U1.91@98.21,106.08 ; U2.26@146.804,94.808 146.804,93.886 v1@147.08,93.61
  Bottom Layer w0.254: v1(97.95,103.4) 103.833,103.4 115.293,91.94 133.76,91.94 133.78,91.92 145.569,91.92 147.1,93.451 v1(147.1,93.58) ; v1@147.007,93.56 v1@147.04,93.56
NetU1_99: U1.99 U3.26 | length 144.6
  Top Layer w0.254: v1(101.65,101.69) 101.65,104.173 102.213,104.737 ; U1.99@102.22,106.35 U1.99@102.221,106.351 ; v1@159.69,114.95 160.012,115.272 U3.26@160.012,116.202
  Mid-Layer 1 w0.254: v1@132.36,91.32 183.64,91.32 187.327,95.007 187.327,115.36 186.78,115.907 186.78,115.95 160.65,115.95 v1@159.69,114.99
  Bottom Layer w0.254: v1@101.66,101.59 111.986,91.264 112.045,91.322 v1@132.18,91.322
  other v1: 132.29,91.3 159.696,114.977
OE: U1.183 U2.28 U3.28 U4.28 U5.28 U6.41 U7.41 | length 207.1
  Top Layer w0.254: U1.183@91.698,134.996 91.698,139.188 v1@93.88,141.37 ; v1@117.27,116.8 118.233,116.8 118.24,116.793 120.446,116.793 U6.41@120.453,116.8 122.215,116.8 122.607,116.408 122.607,104.815 131.277,96.145 131.964,96.145 U7.41@132.137,95.972 132.908,95.972 v1@134.2,94.68 ; U2.28@147.804,94.808 147.804,97.547 159.72,109.463 ; 159.699,109.441 159.72,109.463 ; U3.28@161.012,116.202 161.012,115.375 160.019,114.382 160.019,114.379 159.83,114.19 159.74,114.19 159.72,114.19 159.72,114.01 159.72,109.463 ; 174.21,95.58 172.78,97.01 v1(172.78,98.51) 172.78,98.662 187.43,113.312 U5.28@187.43,116.58
  Mid-Layer 1 w0.254: v1(117.21,116.71) 119.11,116.71 126.45,124.05 126.45,139.15 v1@124.32,141.28
  Mid-Layer 2 w0.254: v1(117.21,116.71) v1@117.293,116.793 ; v1@134.24,94.63 130.463,98.407 130.463,103.46 130.84,103.837 138.651,103.837 143.878,98.61 v1(148.4,98.61)
  Bottom Layer w0.254: v1(93.84,141.4) 93.85,141.41 123.93,141.41 v1@124,141.34 ; v1@159.71,114.02 159.71,113.69 159.71,111.58 v1(172.78,98.51)
  other v1: 134.2,94.67 159.7,114.01 124.17,141.27
PS: U1.75 U2.12 U3.12 U4.12 U5.12 U6.28 U7.28 | length 222.1
  Top Layer w0.254: v1@87.525,101.5 90.198,104.173 U1.75@90.198,105.796 ; v1@118.48,126.66 118.88,127.06 119.56,127.06 119.593,127.027 120.28,127.027 U6.28@120.453,127.2 126.563,127.2 127.439,126.324 127.439,110.383 131.277,106.545 131.964,106.545 U7.28@132.137,106.372 133.528,106.372 v1@134.28,105.62 ; v1@151.74,111.78 152.213,112.253 152.213,112.83 152.304,112.921 U2.12@152.304,113.957 ; U2.12@152.3,113.83 152.3,116.802 165.23,129.732 165.23,132.167 165.51,132.447 165.51,135.2 U3.12@165.52,135.21 ; v1(178.35,119.81) 178.35,120.104 191.93,133.684 U5.12@191.93,135.78 ; v1@178.36,119.79 178.36,118.29 178.72,117.93 U4.12@178.72,113.957
  Mid-Layer 2 w0.254: v1(87.55,101.475) 87.55,91.371 88.274,90.647 88.274,87.201 89.851,85.624 118.074,85.624 ; 118.05,85.6 118.074,85.624 ; v1(118.41,126.65) 118.41,126.137 119.287,125.26 119.287,86.837 118.074,85.624 ; v1(134.26,105.65) 140.527,111.917 147.31,111.917 147.517,111.71 v1@151.67,111.71
  Bottom Layer w0.254: v1(165.22,130.67) 165.22,129.428 168.2,126.448 171.541,126.448 178.249,119.74 v1@178.4,119.74
  other v1: 151.66,111.72
"USB 3.3V": C36.1 IC2.6 IC2.13 | length 11
  Top Layer w0.254: v1@162.8,150.47 162.8,148.738 161.791,147.729 161.129,147.729 IC2.6@160.906,147.506 161.674,147.506 163.397,145.783 164.891,145.783 165.083,145.591 165.083,145.557 IC2.13@165.29,145.35
  Bottom Layer w0.254: v1(162.86,150.46) C36.1@164.38,150.46
"USB D+": J1.3 R9.1 R10.1 | length 17.2
  Top Layer w0.254: J1.3@136.396,144.124 142.294,144.124 144.598,146.428 R9.1@150.096,146.428 R10.1@150.096,148.968
"USB D-": J1.2 R6.1 | length 15
  Top Layer w0.254: J1.2@136.396,142.124 142.364,142.124 144.194,143.954 R6.1@150.114,143.954 R6.1@149.732,144.336
"USB PWR": J1.1 L2.2 | length 10.7
  Top Layer w0.254: 143.23,140.61 143.25,140.59 L2.2@143.99,140.59
  Top Layer w0.5: J1.1@133.896,142.124 135.41,140.61 143.23,140.61
WE: U1.179 U2.11 U3.11 U4.11 U5.11 U6.17 U7.17 | length 160.4
  Top Layer w0.254: U1.179@93.698,134.996 93.698,132.888 v1@94.208,132.378 ; v1@130.27,126.46 131.01,127.2 134.485,127.2 140.656,121.029 140.656,108.566 142.677,106.545 U7.17@143.364,106.545 ; U7.17@143.537,106.372 147.252,106.372 v1(148.13,107.25) v1@148.14,107.26 ; U2.11@152.804,113.957 152.804,116.664 165.91,129.77 165.91,131.995 166.02,132.105 U3.11@166.02,135.08 ; v1(152.84,112.57) U2.11@152.84,113.43 ; v1@179.05,118.48 179.22,118.31 U4.11@179.22,113.957 ; v1(179.06,118.52) 179.06,120.172 192.44,133.552 U5.11@192.44,135.83
  Mid-Layer 1 w0.254: v1(148.13,107.25) 152.88,112 v1@152.88,112.49
  Mid-Layer 2 w0.254: v1(94.14,132.38) 94.603,132.843 94.603,133.4 94.98,133.777 123.153,133.777 v1@130.32,126.61
  Bottom Layer w0.254: v1(165.91,131.96) 165.91,129.394 166.303,129.001 166.303,128.987 168.388,126.902 172.145,126.902 179.123,119.924 179.123,118.543 v1@179.06,118.48
  other v1: 130.36,126.56
pads on no net: IC1.3 IC1.6 IC2.1 IC2.2 IC2.15 IC2.16 IC2.18 IC2.19 IC2.20 IC2.21 IC2.23 IC2.32 J1.5 J1.6 RESET.0 U1.2 U1.4 U1.6 U1.8 U1.10 U1.30 U1.34 U1.36 U1.37 U1.38 U1.52 U1.117 U1.141 U1.206 U2.9 U3.9 U4.10 U4.13 U5.10 U5.13

## Polygon pours and split planes (outlines as drawn)
GND on GND "GND-GND" (solid): 52.525,157.4 52.725,157.2 205.2,157.2 205.2,84.35 205,84.15 52.7,84.15
3.3V on POWER "3.3V" (solid): 52.35,157.4 205.2,157.4 205.2,84.15 52.7,84.15 52.525,84.325

## Keep-outs
Keep-Out Layer:
  lines w0.5: 52.1,83.72 205.7,83.72 205.7,157.69 52.1,157.69 52.1,83.72

## Text inside footprints (layer, text, board x,y; h text height)
Connecter1: Top Overlay "2" at 65.162,86.89 h1.27; Top Overlay "1" at 65.262,89.53 h1.27
Connecter2: Top Overlay "2" at 123.814,154.918 h1.27 r180; Top Overlay "1" at 123.714,152.278 h1.27 r180
Connecter3: Top Overlay "2" at 59.922,93.102 h1.27 r90; Top Overlay "1" at 57.282,93.202 h1.27 r90